# EAGLE board FrontPanelMonoPCB (EAGLE 8.6.3)
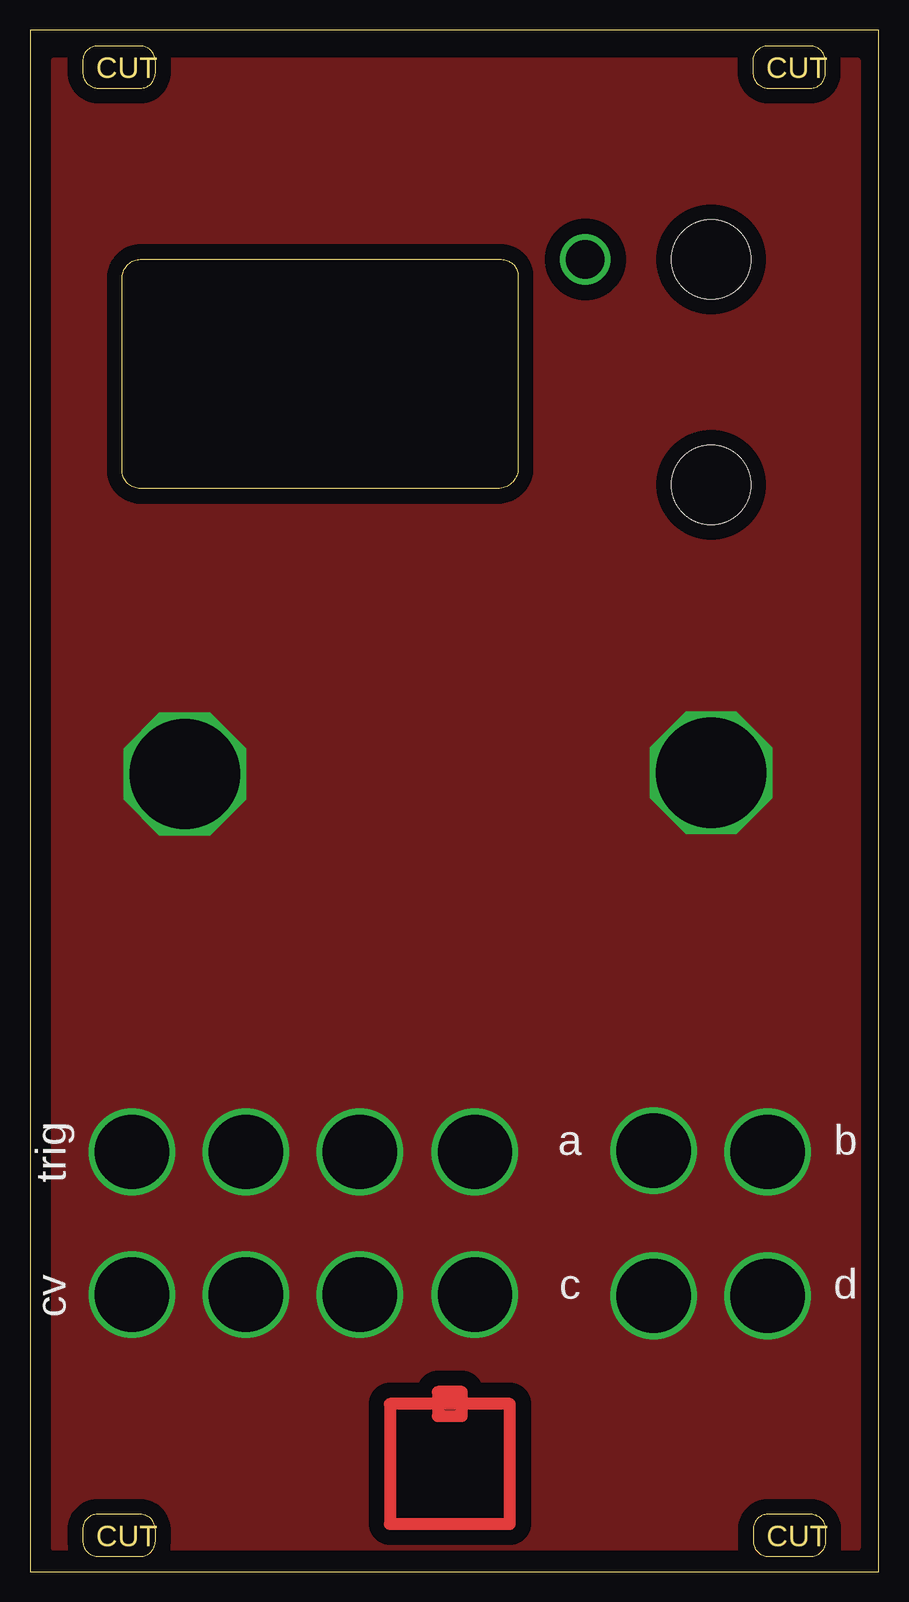
[diagram p0: board, top side]
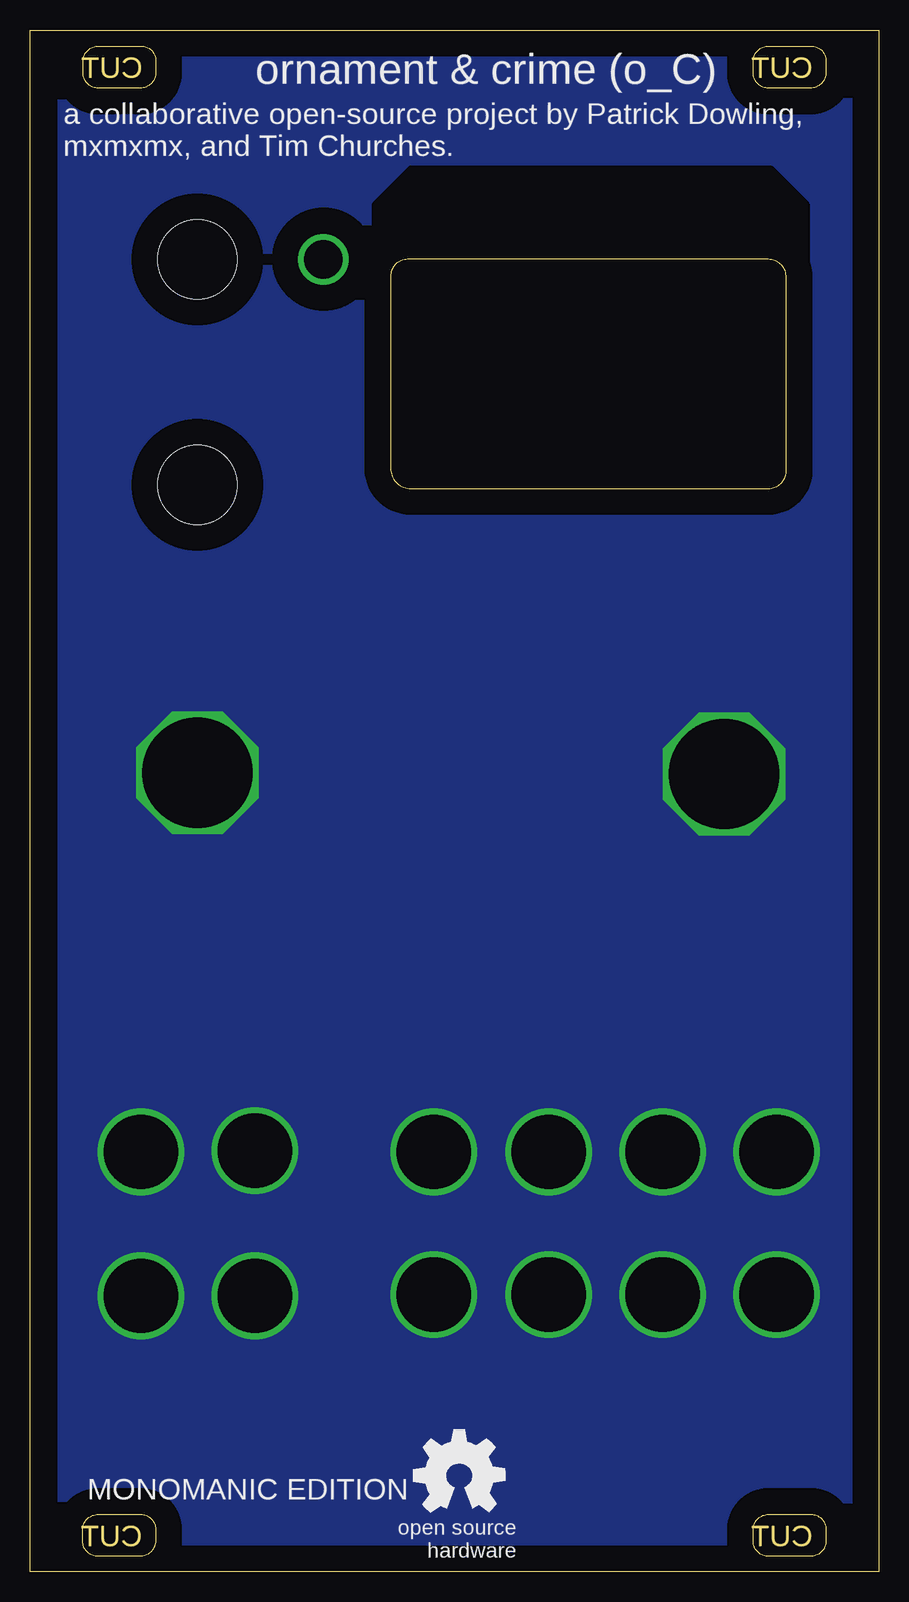
[diagram p1: board, bottom side, seen from below]

Size 70.77 x 128.52 mm. Coordinates in mm from the lower left corner, seen from the top.
Outline: 0,0 70.77,0 70.77,128.52 0,128.52 0,0
Outline: 7.7,92 7.7,107.7 7.7,107.9 arc-90 9.2,109.4 39.3,109.4 arc-90 40.7,108 40.7,107.6 40.7,92 arc-90 39,90.3 9.2,90.3 arc-97 7.7,92
Outline: 5.7,123.68 9.2,123.68 arc90 10.46,124.94 10.46,125.49 10.46,125.92 arc90 9.2,127.18 5.62,127.18 arc90 4.4,125.96 4.4,125.5 4.4,124.98 arc90 5.7,123.68
Outline: 61.57,123.68 65.07,123.68 arc90 66.33,124.94 66.33,125.49 66.33,125.92 arc90 65.07,127.18 61.49,127.18 arc90 60.27,125.96 60.27,125.5 60.27,124.98 arc90 61.57,123.68
Outline: 5.7,1.28 9.2,1.28 arc90 10.46,2.54 10.46,3.09 10.46,3.52 arc90 9.2,4.78 5.62,4.78 arc90 4.4,3.56 4.4,3.1 4.4,2.58 arc90 5.7,1.28
Outline: 61.6,1.28 65.1,1.28 arc90 66.36,2.54 66.36,3.09 66.36,3.52 arc90 65.1,4.78 61.52,4.78 arc90 60.3,3.56 60.3,3.1 60.3,2.58 arc90 61.6,1.28
Copper layers (1*16): Top 0.035mm / dielectric 1.6mm / Bottom 0.035mm
Design rules "Elecrow_2-layer_PCB_eagle_rule": minimum track width 6mil, minimum drill 12mil, track to track 6mil, track to pad 6mil, pad to pad 6mil, via to via 8mil, smd to smd 0mil, copper to edge 20mil, drill to drill 10mil, minimum pad ring 6mil, minimum via ring 6mil, stop-mask expansion 0mil, vias tented up to drill 100mil, thermal gap 10mil
Holes 6.6 mm at 56.8,109.4 56.8,90.6

## Placement (x,y rotation side)
E$1  [OSHW_8MM]  35,8 0 bottom

## Library data of the parts
E$1 = oshw

## Tracks (layer width: path | path; a pad name or v marks a point on that pad's centre or on a via)
GDN  (via drill 6.2 pad 6.2, 6.2 pad 6.4, 9.2 pad 6.2)
  other vias: 52,35.1 61.5,35 52,23 61.5,23 12.9,66.5 56.8,66.6 8.5,35 18,35 27.5,35 37.1,35 8.5,23.1 18,23.1 27.5,23.1 37.1,23.1
  pour Bottom (isolate 2.184): 2,3 2,123 2,126 68,126 68,2 2,2
  pour Top (isolate 1.27): 2,126 69,126 69,2 2,2
S$1
  cutout Bottom: 7,110 41,110 42,110 42,114 39,117 11,117 10,117 9,117 6,114 6,110
S$4
  Top 1: 34,14 40,14 40,4 35,4 30,4 30,14 34,14 | 34,14 34,13 36,13 36,15 34,15 34,14
S$28  (via drill 3.2 pad 4)
  other vias: 46.3,109.4

## Text on the board
Dimension: CUT | CUT | CUT | CUT
bPlace: ornament & crime (o_C) | a collaborative open-source project by Patrick Dowling, / mxmxmx, and Tim Churches. | MONOMANIC EDITION
tNames: a | b | trig | c | d | cv